# Altium PCB SH-C30L-V1.0.PcbDoc
Units mil, origin at the board's own origin, x right, y up, seen from the top; angles counter-clockwise.
Board outline 2690.16 x 1551.18 mil, 2 copper layers (Top Layer, Bottom Layer), stack 62.206 mil thick; 33 components, 25 nets, 131 pads, 46 vias.
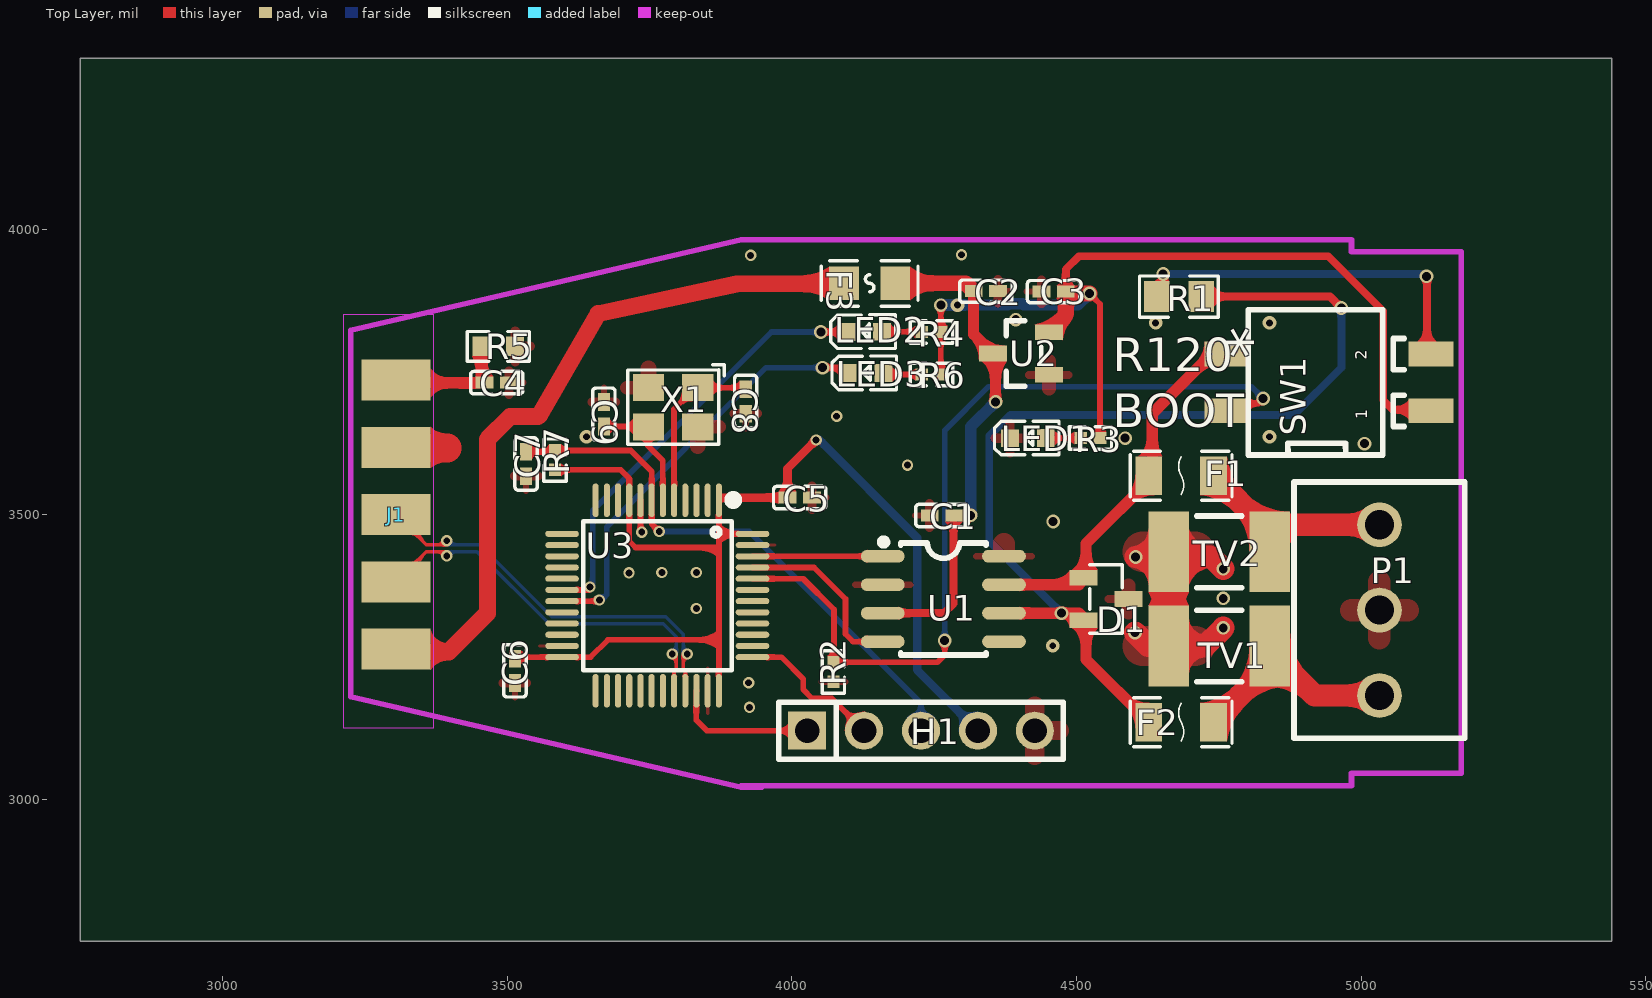
[diagram p0: Top Layer view]
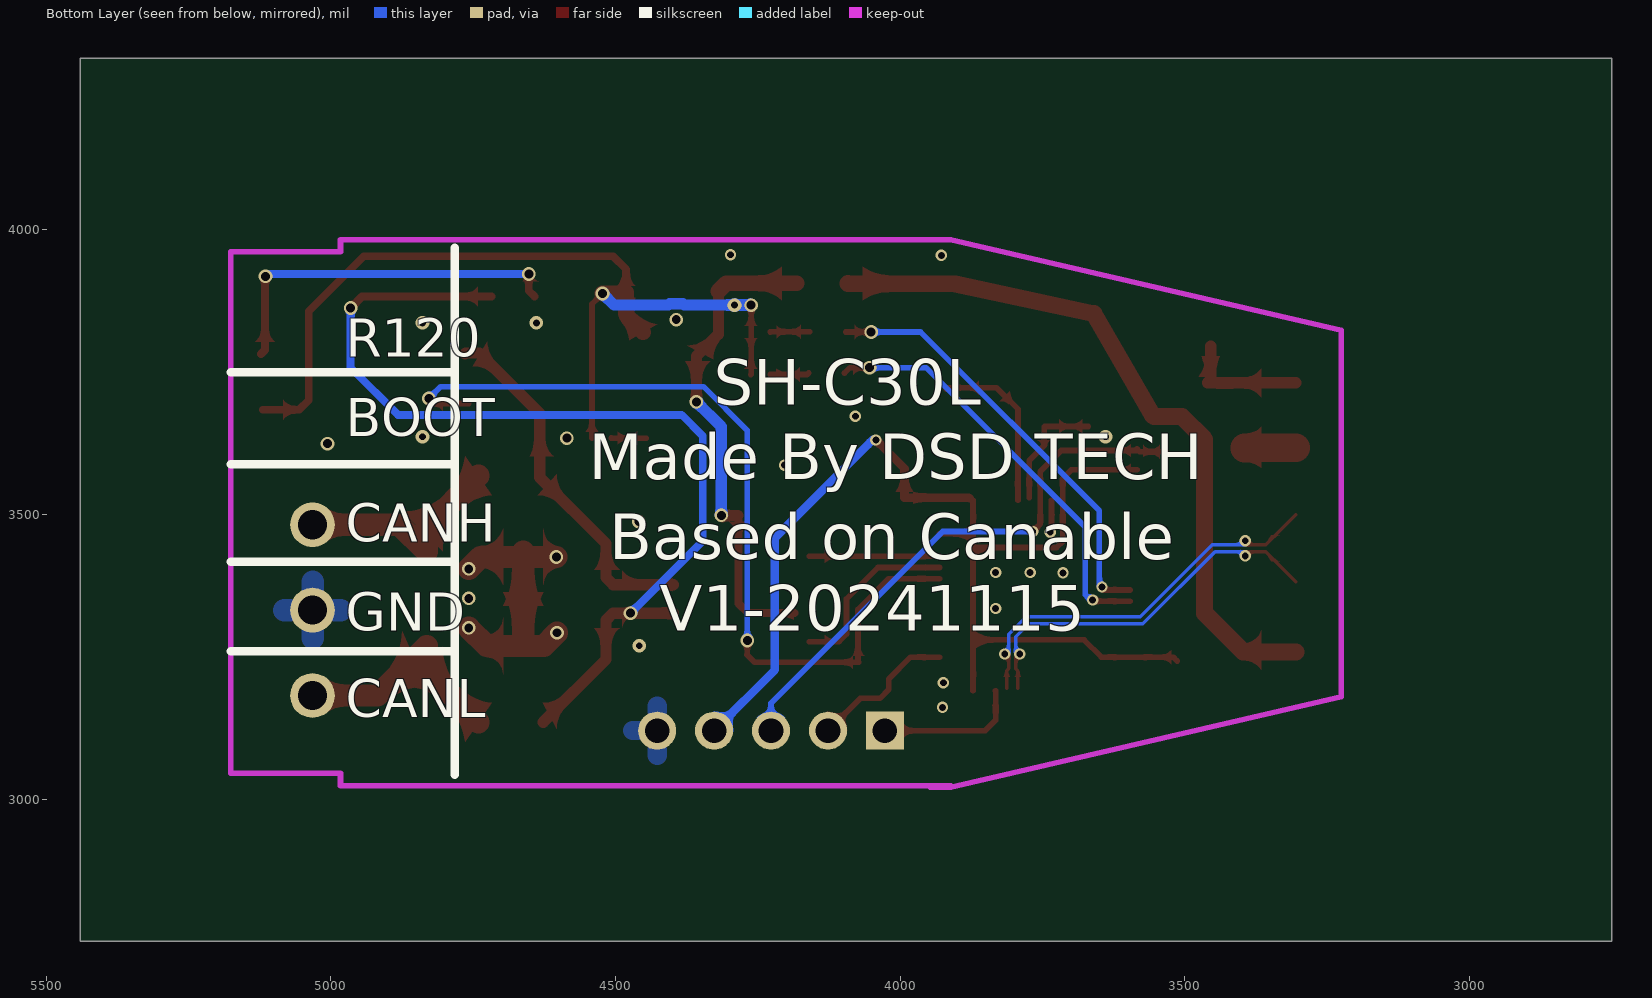
[diagram p1: Bottom Layer view, seen from below]

## Layer stack, top to bottom
Top Solder Mask Layer: solder mask 0.394, Dk 3.3
Top Layer: signal copper 1.379
Dielectric1: surface 59.449, FR4, Dk 4.5
Bottom Layer: signal copper 1.378
Bottom Solder Mask Layer: solder mask 0.394, Dk 3.3

## Board outline
5440.16,2750 2750,2750 2750,4301.18 5440.16,4301.18

## Design rules (kind name [scope] priority, off if disabled: settings)
BoardOutlineClearance Default [All] p0: genericclearance=10 ignorepadtopadclearanceinfootprint=FALSE except(0: Arc-SplitContinuation Track-SplitContinuation SMDPad-SplitContinuation THPad-SplitContinuation Via-SplitContinuation Fill-SplitContinuation Poly-SplitContinuation Region-SplitContinuation Text-SplitContinuation)
BoardOutlineClearance Plane_Default [All] p0: genericclearance=10 ignorepadtopadclearanceinfootprint=FALSE except(0: Arc-SplitContinuation Track-SplitContinuation SMDPad-SplitContinuation THPad-SplitContinuation Via-SplitContinuation Fill-SplitContinuation Poly-SplitContinuation Region-SplitContinuation Text-SplitContinuation)
BoardOutlineClearance Copper_gge7917 [All] p0: genericclearance=10 ignorepadtopadclearanceinfootprint=FALSE except(0: Arc-SplitContinuation Track-SplitContinuation SMDPad-SplitContinuation THPad-SplitContinuation Via-SplitContinuation Fill-SplitContinuation Poly-SplitContinuation Region-SplitContinuation Text-SplitContinuation)
BoardOutlineClearance Copper_gge7914 [All] p0: genericclearance=10 ignorepadtopadclearanceinfootprint=FALSE except(0: Arc-SplitContinuation Track-SplitContinuation SMDPad-SplitContinuation THPad-SplitContinuation Via-SplitContinuation Fill-SplitContinuation Poly-SplitContinuation Region-SplitContinuation Text-SplitContinuation)
BoardOutlineClearance otherClearance [All] p0: genericclearance=10 ignorepadtopadclearanceinfootprint=FALSE except(0: Arc-SplitContinuation Track-SplitContinuation SMDPad-SplitContinuation THPad-SplitContinuation Via-SplitContinuation Fill-SplitContinuation Poly-SplitContinuation Region-SplitContinuation Text-SplitContinuation)
Clearance Default [All] p1: gap=7 ignorepadtopadclearanceinfootprint=FALSE
Clearance Plane_Default [All] p1: gap=7 ignorepadtopadclearanceinfootprint=FALSE
Clearance Copper_gge7917 [All] p1: gap=7 ignorepadtopadclearanceinfootprint=FALSE
Clearance Copper_gge7914 [All] p1: gap=7 ignorepadtopadclearanceinfootprint=FALSE
Clearance otherClearance [All] p1: gap=7 ignorepadtopadclearanceinfootprint=FALSE
DiffPairsRouting differentialPair [All] p1: maxuncoupledlength=10 minlimit=6 maxlimit=Infinity mostfreqgap=6 toplayer_minwidth=5 toplayer_prefwidth=10 toplayer_maxwidth=100 bottomlayer_minwidth=5 bottomlayer_prefwidth=10 bottomlayer_maxwidth=100
PasteMaskExpansion pasteMaskExpansion [All] p1: expansion=0
PlaneConnect Default [All] p1: planeconnectstyle=Relief reliefexpansion=20 reliefentries=4 reliefconductorwidth=0 reliefairgap=10
PolygonConnect gge7917 [All] p1: connectstyle=Direct reliefentries=4 reliefconductorwidth=10 polygonreliefangle="90 Angle" airgapwidth=10
PolygonConnect gge7914 [All] p1: connectstyle=Relief reliefentries=4 reliefconductorwidth=0 polygonreliefangle="90 Angle" airgapwidth=10
RoutingVias Default [All] p1: viastyle="Through Hole" holewidth=12 minholewidth=12 maxholewidth=2362 width=12 minwidth=12 maxwidth=2362
SolderMaskExpansion solderMaskExpansion [IsVia] p1: useseparateexpansions=TRUE expansion=-1000 expansionbottom=-1000
SolderMaskExpansion solderMaskExpansion [All] p2: useseparateexpansions=TRUE expansion=4 expansionbottom=4
Width Default [All] p1: maxlimit=1000 minlimit=10 preferedwidth=10

## Components (designator, comment, footprint, x,y, rotation, side; value= is the part's Value field where it differs from the comment)
C1 "" C0402 4263.58,3498.03 r0 top locked
C2 "" C0402 4340.75,3892.12 r180 top locked
C3 "" C0402 4459.84,3891.33 r0 top locked
C4 "" C0402 3481.5,3731.49 r180 top locked
C5 "" C0402 4013.78,3529.52 r180 top locked
C6 "" C0402 3513.39,3225.19 r90 top locked
C7 "" C0402 3533.07,3588.58 r90 top locked
C8 "" C0402 3918.9,3698.42 r270 top locked
C9 "" C0402 3669.69,3675.98 r270 top locked
D1 "" SOT-23-3_L2.9-W1.3-P1.90-LS2.4-BR 4551.97,3351.49 r180 top locked
F1 "" F1206 4683.86,3568.03 r0 top locked
F2 "" F1206 4683.86,3134.96 r0 top locked
F3 "" F0805 4136.62,3905.9 r0 top locked
H1 "" HDR-TH_5P-P2.54-V-M 4226.77,3120.08 r0 top locked
J1 "" "4P-4AWD - PAD - DUPLICATE - DUPLICATE" 3304.88,3263.26 r0 top locked
LED1 "" LED0603-RD_RED 4414.57,3633.86 r0 top locked
LED2 "" LED0603-RD 4127.19,3820.73 r0 top locked
LED3 "" LED0603-RD 4129.14,3748.42 r0 top locked
P1 "" CONN-TH_3P-P3.81_WJ124-3.81-3P 5032.28,3331.81 r0 top locked
R1 "" R0805 4680.07,3882.67 r180 top locked
R2 "" R0402 4072.84,3223.23 r90 top locked
R3 "" R0402 4524.3,3634.25 r180 top locked
R4 "" R0402 4245.28,3820.47 r180 top locked
R5 "" R0603 3484.26,3795.27 r180 top locked
R6 "" R0402 4245.39,3745.67 r180 top locked
R7 "" R0402 3583.86,3595.27 r270 top locked
SW1 "" SW-SMD_4P-L6.5-W6.0-P2.54-LS9.8 4943.7,3731.89 r90 top locked
TV1 "" DIO-DT-SMD_L4.5-W3.2 4750.79,3268.82 r180 top locked
TV2 "" DIO-DT-SMD_L4.5-W3.2 4750.79,3434.17 r180 top locked
U1 "" SOIC-8_L5.0-W4.0-P1.27-LS6.0-BL 4266.14,3351.49 r270 top locked
U2 "ME6209A33M3G" SOT-23(SOT-23-3) 4402.36,3782.67 r90 top locked
U3 "" LQFP-48_L7.0-W7.0-P0.50-LS9.0-BL 3763.53,3357.5 r180 top locked
X1 "" OSC-SMD_4P-L3.2-W2.5-BL 3791.34,3688.19 r180 top locked

## Footprints (in the part's own frame and the unit in brackets; to place one, negate y for a bottom-side part, rotate by r counter-clockwise, add the part's x,y. Pads: shape width x height; smd on the part's side, far side on the other; paste and mask are expansions set on the pad)
"4P-4AWD - PAD - DUPLICATE - DUPLICATE" [mil]
  rect 121.17x72 smd: 1VBUS(0,0) 2D(0,118.11) 3D(0,236.22) 4GND(0,354.33) 5SHIELD(0,472.44)
C0402 [mm]
  rect 0.79x0.54 smd paste-100 mask+0.051: 1(-0.545,0) 2(0.545,0)
  silkscreen extent -1.17,-0.5 1.17,0.5
CONN-TH_3P-P3.81_WJ124-3.81-3P [mil]
  round 78.7 hole 51.2 paste+0 mask+2: 1(0,150) 2(0,0) 3(0,-150)
  silkscreen extent -150,-225 150,225
DIO-DT-SMD_L4.5-W3.2 [mil]
  rect 70.9x141.7 smd paste+0 mask+2: 1(-88.6,0) 2(88.6,0)
  silkscreen extent -39,-63 39,63
F0805 [mm]
  rect 1.335x1.5 smd paste-100 mask+0.051: 1(-1.142,0) 2(1.142,0)
  silkscreen extent -2.16,-1.02 2.16,1.02
F1206 [mil]
  rect 46.9x68 smd paste+0 mask+2: 1(-56.9,0) 2(56.9,0)
  silkscreen extent -89,-43 89,43
HDR-TH_5P-P2.54-V-M [mm]
  rect 1.7x1.7 hole 1.1 paste+0 mask+0.051: 1(-5.08,0)
  round 1.7 hole 1.1 paste+0 mask+0.051: 2(-2.54,0) 3(0,0) 4(2.54,0) 5(5.08,0)
  silkscreen extent -6.35,-1.27 6.35,1.27
LED0603-RD [mm]
  rect 0.8x0.8 smd paste+0 mask+0.051: 1(-0.799,-0.003) 2(0.799,0.003)
  silkscreen extent -1.49,-0.75 1.39,0.76
LED0603-RD_RED [mm]
  rect 0.8x0.8 smd paste+0 mask+0.051: 1(-0.8,-0.003) 2(0.8,0.003)
  silkscreen extent -1.49,-0.75 1.39,0.76
LQFP-48_L7.0-W7.0-P0.50-LS9.0-BL [mm]
  oval 0.27x1.5 smd paste+0 mask+0.05: 1(-2.75,-4.25) 2(-2.25,-4.25) 3(-1.75,-4.25) 4(-1.25,-4.25) 5(-0.75,-4.25) 6(-0.25,-4.25) 7(0.25,-4.25) 8(0.75,-4.25) 9(1.25,-4.25) 10(1.75,-4.25) 11(2.25,-4.25) 12(2.75,-4.25) 25(2.75,4.25) 26(2.25,4.25) 27(1.75,4.25) 28(1.25,4.25) 29(0.75,4.25) 30(0.25,4.25) 31(-0.25,4.25) 32(-0.75,4.25) 33(-1.25,4.25) 34(-1.75,4.25) 35(-2.25,4.25) 36(-2.75,4.25)
  oval 1.5x0.27 smd paste+0 mask+0.05: 13(4.25,-2.75) 14(4.25,-2.25) 15(4.25,-1.75) 16(4.25,-1.25) 17(4.25,-0.75) 18(4.25,-0.25) 19(4.25,0.25) 20(4.25,0.75) 21(4.25,1.25) 22(4.25,1.75) 23(4.25,2.25) 24(4.25,2.75) 37(-4.25,2.75) 38(-4.25,2.25) 39(-4.25,1.75) 40(-4.25,1.25) 41(-4.25,0.75) 42(-4.25,0.25) 43(-4.25,-0.25) 44(-4.25,-0.75) 45(-4.25,-1.25) 46(-4.25,-1.75) 47(-4.25,-2.25) 48(-4.25,-2.75)
  silkscreen extent -3.59,-4.46 3.3,3.34
OSC-SMD_4P-L3.2-W2.5-BL [mm]
  rect 1.4x1.2 smd paste+0 mask+0.051: 1(-1.1,-0.875) 2(1.1,-0.875) 3(1.1,0.875) 4(-1.1,0.875)
  silkscreen extent -2.29,-1.9 2.03,1.65
R0402 [mm]
  rect 0.566x0.54 smd paste-100 mask+0.051: 1(-0.433,0) 2(0.433,0)
  silkscreen extent -0.94,-0.5 0.94,0.5
R0603 [mil]
  rect 31.75x34.02 smd paste-3937.01 mask+2: 1(-29.66,0) 2(29.66,0)
  silkscreen extent -55,-26 55,26
R0805 [mm]
  rect 1.133x1.377 smd paste-100 mask+0.051: 1(-1,0) 2(1,0)
  silkscreen extent -1.76,-0.92 1.76,0.92
SOIC-8_L5.0-W4.0-P1.27-LS6.0-BL [mil]
  oval 22.38x76.78 smd paste+0 mask+2: 1(-75,-106.5) 2(-25,-106.5) 3(25,-106.5) 4(75,-106.5) 5(75,106.5) 6(25,106.5) 7(-25,106.5) 8(-75,106.5)
  silkscreen extent -106,-111 98,75
SOT-23(SOT-23-3) [mm]
  rect 0.7x1.25 smd paste+0 mask+0.102: 1(-0.95,-1.25) 2(0.95,-1.25) 3(0,1.25)
  silkscreen extent -1.46,-0.9 1.46,0.65
SOT-23-3_L2.9-W1.3-P1.90-LS2.4-BR [mm]
  rect 1.25x0.7 smd paste+0 mask+0.051: 1(1,-0.95) 2(1,0.95) 3(-1,0)
  silkscreen extent -0.73,-1.53 0.73,1.53
SW-SMD_4P-L6.5-W6.0-P2.54-LS9.8 [mm]
  rect 1.1x2 smd paste+0 mask+0.051: 1(-1.27,-4.55) 2(1.27,-4.55) 3(1.27,4.55) 4(-1.27,4.55)
  silkscreen extent -3.24,-3.35 3.24,3.6

## Via types
v1: diameter 24.02, hole 15.7, Top Layer to Bottom Layer, 21 vias
v2: diameter 20, hole 12, Top Layer to Bottom Layer, 19 vias
v3: diameter 24, hole 12, Top Layer to Bottom Layer, 6 vias

## Nets (pads, with @x,y where several pads share a name; then routed paths per layer and width w, separated by ;. In a path a pad name is that pad's centre, name@x,y a point inside that pad or via, vN(x,y) a via of type N, cw(c..) or ccw(c..) an arc to the next point about the centre after c; other vN are vias at no path point)
$3N9456: F1.2 P1.1 TV2.1 | length 392
  Top Layer w39.37: F1.2 4831.51,3477.27 4831.51,3434.17 4879.15,3481.81 P1.1
$3N14841: F3.1 J1.1VBUS | length 1242.4
  Top Layer w30: J1.1VBUS@3304.88,3258.54 3397.13,3258.54 3464.96,3326.38 3464.96,3631.89 3504.73,3671.65 3553.55,3671.65 ; 3556.7,3674.01 3659.85,3852.75 3902.36,3904.72 F3.1
$3N14842: LED1.2 R3.2 | length 61.3
  Top Layer w10: LED1.2 4507,3633.99 R3.2
$3N14843: LED2.2 R4.2 | length 69.7
  Top Layer w10: LED2.2 4227.84,3820.86 R4.2
$3N14844: LED3.2 R6.2 | length 68.9
  Top Layer w10: LED3.2 4163.5,3745.67 R6.2
$3N22964: C9.2 U3.6 X1.3 | length 213.1
  Top Layer w10: C9.2 3746.07,3654.52 3746.85,3653.74 3746.85,3620.87 3773.37,3594.35 U3.6@3773.37,3529.15
$3N23449: C8.1 U3.5 X1.1 | length 302.7
  Top Layer w10: U3.5 3793.06,3684.98 3830.71,3722.64 X1.1 3916.15,3722.64 C8.1
$3N28180: F2.2 P1.3 TV1.1 | length 408.3
  Top Layer w39.37: F2.2 4831.51,3225.71 4831.51,3268.82 4918.52,3181.81 P1.3
$3N29005: R1.2 SW1.2 | length 656.1
  Top Layer w13.78: R1.2@4642.03,3882.67 4652.36,3893.01 v1(4652.36,3922.44) ; SW1.2 5115.75,3788.97 v1@5115.75,3918.11 ; v1@5115.75,3918.11 5114.96,3918.89 5115.75,3919.68 v1@5115.75,3918.11
  Bottom Layer w13.78: v1(4652.36,3922.44) v1@5110.63,3922.44 ; v1(5114.96,3918.11) v1@5110.63,3922.44 ; v1@5115.35,3922.44 v1@5110.63,3922.44
$3N35720: C4.2 J1.5SHIELD R5.2 | length 221.4
  Top Layer w20: J1.5SHIELD@3304.88,3730.98 3459.53,3730.98 C4.2 3454.6,3736.94 R5.2
+3V3: C3.2 C5.2 C6.2 H1.4 R3.1 R4.1 R6.1 R7.2 SW1.1 U2.2 U3.1 U3.9 U3.24 U3.36 U3.48 | length 3714
  Top Layer w10: C6.2@3513.39,3242.32 3520.29,3249.23 U3.24 3646.48,3249.23 3676.77,3279.53 3871.71,3279.53 3871.8,3279.61 ; R7.2 3699.33,3578.23 3714.32,3563.24 U3.9@3714.32,3529.15 ; U3.9 3714.32,3452.61 3725.2,3441.73 3867.2,3441.73 3871.8,3446.33 ; U3.36 3871.8,3279.61 ; U3.1 3871.8,3446.33 ; 3872.44,3466.14 3872.82,3465.77 U3.48 ; v1(4261.77,3867.71) 4261.77,3746.32 R6.1 ; v1(4522.84,3888.19) 4541.34,3869.68 R3.1 ; 3871.8,3279.61 3871.8,3446.33
  Top Layer w13.78: C3.2@4481.3,3890.15 4481.3,3930.51 4504.33,3953.54 4942.13,3953.54 5038.98,3856.69 5038.98,3700.78 5055.91,3683.86 SW1.1@5119.69,3683.86
  Top Layer w15: 3877.96,3528.34 3879.14,3529.52 C5.2 3992.32,3580.51 v2(4042.52,3630.71)
  Top Layer w27.56: U2.2 4481.3,3849.81 4481.3,3890.15 4483.27,3888.19 v1(4522.84,3888.19)
  Bottom Layer w15: v2(4042.52,3630.71) 4048.43,3630.71 4220.08,3459.05 4220.08,3226.77 H1.4
  Bottom Layer w19.68: v1(4261.77,3867.71) v3(4290.86,3867.71) 4379.51,3867.71 4381.77,3869.97 4404.84,3869.97 4407.1,3867.71 4502.36,3867.71 v1(4522.84,3888.19)
+5V: C1.2 C2.2 F3.2 U1.3 U2.3 | length 861.9
  Top Layer w13.78: U1.3@4185.63,3326.49 4267.05,3326.49 4283.86,3343.3 4283.86,3494.49 4286.22,3496.85 C1.2
  Top Layer w19.68: C1.2 4313.78,3498.03 v1(4314.18,3498.42) ; C2.2 4319.29,3816.55 U2.3 4357.88,3777.96 v1(4357.88,3697.63)
  Top Layer w27.6: F3.2 4305.51,3905.9 C2.2
  Bottom Layer w19.68: v1(4314.18,3498.42) 4314.18,3653.93 v1(4357.88,3697.63)
BOOT0: R2.2 SW1.4 U3.44 | length 1532.5
  Top Layer w10: U3.44 4020.06,3387.03 4074.02,3333.07 4074.02,3241.45 R2.2 4255.62,3240.27 4268.9,3253.54 ; v1@4263.78,3280.71 v1@4268.31,3285.23 ; 4268.51,3255.51 v1(4268.51,3278.34) ; SW1.4@4757.88,3694.88 4819.29,3694.88 v1(4827.95,3703.54)
  Bottom Layer w10: v1(4268.51,3278.34) 4268.51,3647.63 4345.28,3724.41 4807.09,3724.41 v1(4827.95,3703.54)
CAN_RXD: U1.4 U3.45 | length 318.9
  Top Layer w10: U3.45 4038.96,3406.71 4094.1,3351.57 4094.1,3289.76 4107.36,3276.49 U1.4
CAN_TXD: U1.1 U3.46 | length 228.8
  Top Layer w10: U3.46 4111.16,3426.4 4111.25,3426.49 U1.1
GND: C1.1 C2.1 C3.1 C4.1 C5.1 C6.1 C7.1 C8.2 C9.1 D1.3 H1.5 J1.4GND LED1.1 P1.2 R2.1 R5.1 TV1.2 TV2.2 U1.2 U1.8 U2.1 U3.8 U3.23 U3.35 U3.47 X1.2 X1.4 | length 646.4
  Top Layer w10: U3.8 3734,3475.05 v2@3734.25,3474.8
  Top Layer w39.37: v1(4602.76,3292.12) 4626.06,3268.82 TV1.2 ; v1(4603.94,3425.19) TV2.2@4662.19,3425.19 ; TV2.2 TV2.2@4662.19,3425.19 ; v1(4757.87,3300.78) 4725.91,3268.82 TV1.2 ; v1(4757.87,3404.33) 4737.01,3425.19 TV2.2@4662.19,3425.19 ; TV1.2 TV2.2@4662.19,3425.19
  Top Layer w50: J1.4GND@3304.88,3616.81 3394.22,3616.81 3394.89,3616.14
  other v1: 4757.87,3352.56 4459.06,3487.4 5005.91,3624.41 4585.43,3633.86 4393.31,3842.12
  other v2: 3925.59,3161.02 3924.02,3204.33 3832.29,3334.64 3713.78,3397.24 3771.66,3398.03 3832.29,3398.03 3736.22,3468.89 4203.15,3586.61 4078.64,3672.44 3927.56,3955.11 4298.03,3956.3
  other v3: 4458.35,3269.19 3639.06,3636.51 4839.06,3636.51 4639.06,3836.51 4839.06,3836.51
JL-SWCLK: H1.2 U3.37 | length 260.3
  Top Layer w10: U3.37 3981.48,3249.23 4019.87,3210.84 4019.87,3192.34 4035.44,3176.77 4070.08,3176.77 H1.2
JL-SWDIO: H1.1 U3.34 | length 254.4
  Top Layer w10: U3.34 3831.89,3189.64 3831.89,3138.58 3850.4,3120.08 H1.1
LED1: LED2.1 U3.18 | length 760
  Top Layer w10: U3.18 3644.51,3367.34 v2@3647.25,3370.08 ; v1(4050.79,3820.47) 4095.59,3820.47 LED2.1
  Bottom Layer w10: v2@3650,3374.41 3650,3506.3 3964.18,3820.47 v1(4050.79,3820.47)
  other v2: 3645.28,3372.44
LED2: LED3.1 U3.19 | length 736.4
  Top Layer w10: U3.19 3655.93,3347.66 v2@3656.3,3348.03 ; v1(4053.94,3757.87) 4088.08,3757.87 LED3.1
  Bottom Layer w10: v2@3664.57,3348.82 3674.81,3359.05 3674.81,3477.95 3954.73,3757.87 v1(4053.94,3757.87)
  other v2: 3661.81,3349.6
NRST: C7.2 H1.3 R7.1 U3.7 | length 972.4
  Top Layer w10: C7.2 R7.1@3578.83,3610.04 ; R7.1@3582.48,3613.69 R7.1@3583.86,3615.07 ; R7.1 3716.82,3612.31 3753.69,3575.44 U3.7@3753.69,3529.15 ; U3.7 3753.69,3483.14 v2(3766.93,3469.9)
  Bottom Layer w10: v2(3766.93,3469.9) 3924.98,3469.9 4226.77,3168.11 H1.3
UCAN_H: D1.1 F1.1 SW1.3 U1.7 | length 636
  Top Layer w19.68: U1.7@4398.63,3376.49 4504.53,3376.49 4516.93,3388.89 4516.93,3448.82 4633.07,3564.96 4633.07,3677.16 4739.37,3783.46 4763,3783.46 SW1.3
UCAN_L: D1.2 F2.1 R1.1 U1.6 | length 1740.5
  Top Layer w13.78: R1.1@4718.11,3882.67 4945.28,3882.67 v1(4965.35,3862.59)
  Top Layer w19.68: U1.6@4398.63,3326.49 v1(4473.73,3326.49) 4504.53,3326.49 4516.93,3314.09 4516.93,3244.99 F2.1
  Bottom Layer w13.78: v1(4473.73,3326.49) 4346.85,3453.38 4346.85,3637.79 4383.86,3674.8 4882.28,3674.8 4965.35,3757.87 v1(4965.35,3862.59)
USBDM: J1.2D U3.32 | length 662.6
  Top Layer w6: J1.2D 3357.93,3434.43 v2@3393.7,3434.43 ; U3.32@3793.06,3194.51 3793.06,3224.94 3796.9,3228.78 v2@3796.9,3252.75
  Bottom Layer w6: v2@3395.28,3434.64 3446.85,3434.64 3573.42,3308.08 3773.77,3308.08 3797.03,3284.82 v2@3797.03,3256.69
  other v2: 3789.77,3254.72 3393.7,3427.1
USBDP: J1.3D U3.33 | length 682.5
  Top Layer w6: J1.3D 3357.93,3446.43 v2@3393.7,3446.43 ; v2@3808.9,3252.75 3808.9,3229.29 3812.74,3225.45 U3.33@3812.74,3194.51
  Bottom Layer w6: v2@3395.28,3446.64 3451.82,3446.64 3578.39,3320.08 3778.74,3320.08 3809.03,3289.79 v2@3809.03,3256.69
  other v2: 3816.14,3254.72 3393.7,3453.72
pads on no net: U1.5 U3.2 U3.3 U3.4 U3.10 U3.11 U3.12 U3.13 U3.14 U3.15 U3.16 U3.17 U3.20 U3.21 U3.22 U3.25 U3.26 U3.27 U3.28 U3.29 U3.30 U3.31 U3.38 U3.39 U3.40 U3.41 U3.42 U3.43

## Polygon pours and split planes (outlines as drawn)
$3N14841 on Top Layer (solid, remove dead copper, pour order 0): 4122.05,3935.82 4029.92,3935.82 4027.17,3933.07 4027.17,3878.34 4030.71,3874.8 4122.42,3874.8 4124.18,3876.63 4124.18,3933.69
GND on Top Layer (solid, remove dead copper, pour order 2): 3000,3990.94 3000,3003.94 5175.59,3003.94 5175.59,3990.94
GND on Bottom Layer (solid, remove dead copper, pour order 8): 3038.98,4015.75 3038.98,3000 5190.16,3000 5190.16,4015.75
+3V3 on Bottom Layer (solid, remove dead copper, pour order 4): 4301.97,3881.1 4251.58,3881.1 4251.18,3881.49 4249.21,3881.49 4245.67,3877.95 4245.67,3784.25 4108.66,3647.24 4034.65,3647.24 4031.1,3643.7 4031.1,3621.15 4035.72,3616.53 4121.26,3616.53 4274.41,3769.68 4274.41,3845.27 4274.81,3845.67 4274.81,3848.42 4279.14,3852.75 4302.36,3852.75 4304.33,3854.72 4304.73,3854.72 4304.73,3878.34
+3V3 on Bottom Layer (solid, remove dead copper, pour order 6): 4305.91,3876.77 4301.58,3881.1 4301.58,3881.49 4251.97,3881.49 4248.82,3878.34 4248.82,3858.66 4251.97,3855.51 4301.97,3855.51 4305.91,3859.45

## Keep-outs
Top Layer:
  region: 3211.82,3850.78 3211.82,3124.8 3370.87,3124.8 3370.87,3850.78
Board Outline Layer:
  lines w10: 3224.96,3411.21 3224.96,3776.27 3224.98,3776.27 3224.98,3823.27 3910.98,3982.27 4982.98,3982.27 4982.98,3961.27 5175.98,3961.27 5175.98,3045.27 4982.98,3045.27 4982.98,3023.27 3910.98,3023.27 ; 3224.98,3597.96 3224.98,3179.91 3910.98,3020.91 3946.98,3020.91

## Other copper
Top Layer:
  drawing of 123 lines, arcs and shapes, not listed
Bottom Layer:
  region net NRST: 4221.77,3165.81 4231.77,3165.81 4231.89,3163.21 4232.22,3160.97 4232.76,3159.05 4233.49,3157.41 4234.39,3156 4235.45,3154.77 4236.66,3153.67 4238.01,3152.67 4241.02,3150.75 4244.39,3148.65 4248,3145.98 4249.85,3144.32 4251.72,3142.39 4201.83,3142.39 4203.7,3144.32 4205.55,3145.98 4209.15,3148.65 4212.52,3150.75 4215.54,3152.67 4216.88,3153.67 4218.09,3154.77 4219.16,3156 4220.06,3157.41 4220.79,3159.05 4221.33,3160.97 4221.66,3163.21
  region net +3V3: 4289.13,3147.11 4299.74,3157.72 4301.44,3156.16 4303.1,3154.91 4304.72,3153.96 4306.32,3153.26 4307.91,3152.79 4309.5,3152.51 4312.76,3152.41 4316.19,3152.71 4319.91,3153.16 4324.02,3153.5 4328.64,3153.49 4293.36,3118.21 4293.35,3122.83 4293.69,3126.94 4294.14,3130.66 4294.44,3134.09 4294.34,3137.35 4294.06,3138.94 4293.59,3140.53 4292.89,3142.13 4291.94,3143.75 4290.69,3145.41
  region net BOOT0: 4263.51,3294.75 4273.51,3294.75 4273.59,3293.63 4273.85,3292.5 4274.74,3290.27 4276.01,3288.18 4277.46,3286.35 4259.56,3286.35 4261.01,3288.18 4262.27,3290.27 4263.17,3292.5 4263.42,3293.63
  region net +3V3: 4519.61,3871.04 4505.69,3884.96 4507.49,3886.89 4509.09,3888.84 4511.66,3892.46 4513.41,3895.26 4514.35,3896.68 4531.33,3879.69 4529.91,3878.76 4527.11,3877.01 4523.49,3874.44 4521.54,3872.84
  region net LED1: 4034.38,3815.47 4034.38,3825.47 4035.5,3825.56 4036.63,3825.81 4038.86,3826.7 4040.96,3827.97 4042.78,3829.42 4042.78,3811.52 4040.96,3812.97 4038.86,3814.23 4036.63,3815.13 4035.5,3815.38
  region net LED2: 4037.53,3752.87 4037.53,3762.87 4038.65,3762.96 4039.78,3763.21 4042.01,3764.11 4044.11,3765.37 4045.93,3766.82 4045.93,3748.92 4044.11,3750.37 4042.01,3751.64 4039.78,3752.53 4038.65,3752.78
  region net +3V3: 4276.18,3877.56 4276.18,3857.87 4273.54,3857.78 4271.03,3857.53 4266.65,3856.79 4263.43,3856.04 4261.77,3855.7 4261.77,3879.72 4263.43,3879.38 4266.65,3878.64 4271.03,3877.89 4273.54,3877.65
  region net +5V: 4304.33,3512.83 4324.02,3512.83 4324.11,3510.19 4324.36,3507.68 4325.1,3503.3 4325.84,3500.08 4326.18,3498.42 4302.17,3498.42 4302.51,3500.08 4303.25,3503.3 4303.99,3507.68 4304.24,3510.19
  region net +5V: 4354.65,3680.49 4340.73,3694.41 4342.53,3696.34 4344.13,3698.29 4346.7,3701.91 4348.45,3704.71 4349.38,3706.13 4366.37,3689.14 4364.95,3688.21 4362.15,3686.46 4358.53,3683.89 4356.58,3682.29
  region net BOOT0: 4812.81,3711.61 4819.88,3718.68 4820.74,3717.95 4821.72,3717.33 4823.93,3716.38 4826.3,3715.8 4828.62,3715.53 4815.96,3702.87 4815.7,3705.19 4815.11,3707.56 4814.17,3709.78 4813.54,3710.75
  region net UCAN_L: 4457.26,3333.23 4467,3342.97 4468.64,3341.38 4470.37,3339.98 4472.26,3338.95 4473.3,3338.64 4474.4,3338.48 4461.74,3325.83 4461.59,3326.93 4461.27,3327.96 4460.25,3329.86 4458.84,3331.59
  region net UCAN_L: 4972.24,3846.18 4958.47,3846.18 4958.43,3848.46 4958.2,3850.68 4957.58,3852.75 4957.08,3853.7 4956.4,3854.59 4974.31,3854.59 4973.63,3853.7 4973.12,3852.75 4972.51,3850.68 4972.28,3848.46
  region net +3V3: 4058.68,3631.06 4051.79,3616.74 4050.72,3618.14 4049.44,3619.96 4048.11,3621.41 4047.46,3621.74 4046.84,3621.69 4051.54,3635.02 4052.19,3634.04 4052.95,3633.41 4053.81,3633.02 4054.74,3632.78 4056.72,3632.29 4057.72,3631.82
  region net +3V3: 4276.46,3857.87 4276.46,3877.56 4279.11,3877.65 4281.61,3877.89 4285.99,3878.63 4289.2,3879.38 4290.86,3879.71 4290.86,3855.71 4289.2,3856.05 4285.99,3856.79 4281.61,3857.53 4279.11,3857.78
  region net +3V3: 4305.26,3877.56 4305.26,3857.87 4302.62,3857.78 4300.11,3857.53 4295.74,3856.79 4292.52,3856.05 4290.86,3855.71 4290.86,3879.71 4292.52,3879.38 4295.74,3878.63 4300.11,3877.89 4302.62,3877.65
  region net NRST: 3780.6,3474.9 3780.6,3464.9 3778.83,3464.72 3776.9,3464.21 3775.06,3463.43 3773.6,3462.45 3773.6,3477.36 3775.06,3476.37 3776.9,3475.6 3778.83,3475.09
  region net USBDM: 3794.03,3271.72 3800.03,3263.69 3799.99,3258.75 3799.73,3253.82 3789.5,3264.72 3790.68,3264.9 3791.66,3265.37 3792.45,3266.07 3793.06,3266.96 3793.5,3268.02 3793.81,3269.19
  region net USBDP: 3806.03,3263.69 3812.03,3271.71 3812.26,3269.2 3812.57,3268.04 3813.03,3266.99 3813.64,3266.09 3814.43,3265.39 3815.4,3264.92 3816.57,3264.71 3806.17,3254.03 3806,3258.86
  region net LED1: 3645,3388.84 3655,3381.79 3654.85,3378.27 3654.82,3376.36 3655,3374.79 3641.86,3381.84 3642.78,3382.3 3643.51,3382.94 3644.06,3383.72 3644.46,3384.61 3644.9,3386.65
  region net LED2: 3670.88,3362.2 3675.31,3352.49 3674.14,3351.21 3673,3349.73 3672.02,3348.14 3671.34,3346.56 3663.78,3359.41 3664.71,3359.32 3665.67,3359.39 3667.59,3359.96 3669.38,3360.96
  region net USBDM: 3402.28,3437.64 3410.7,3431.64 3408.13,3431.43 3406.94,3431.15 3405.88,3430.71 3404.99,3430.11 3404.3,3429.33 3403.86,3428.35 3403.7,3427.15 3392.38,3437.01 3397.32,3437.45
  region net USBDP: 3410.69,3449.64 3402.28,3443.64 3397.68,3443.6 3393.08,3443.73 3403.69,3454.19 3403.9,3453.02 3404.38,3452.05 3405.08,3451.26 3405.98,3450.64 3407.03,3450.19 3408.19,3449.88

## Silkscreen, mask and mechanical layers (free items; w line width, h text height)
Top Silkscreen Layer:
  text "R120" at 4563.78,3751.57 h59.06
  text "BOOT" at 4563.78,3653.15 h59.06
Bottom Silkscreen Layer:
  lines w15: 4782.28,3042.91 4782.28,3968.11 ; 4782.28,3259.45 5175.98,3259.45 ; 4782.28,3416.93 5175.98,3416.93 ; 4782.28,3587.91 5175.98,3587.91 ; 4782.28,3749.84 5175.98,3749.84
  text "R120" at 4974.28,3777.16 h66.93
  text "SH-C30L" at 4327.56,3692.52 h79.92
  text "BOOT" at 4974.28,3637 h66.93
  text "Made By DSD TECH" at 4547.25,3561.41 h79.92
  text "CANH" at 4974.28,3451.97 h66.93
  text "Based on Canable" at 4511.02,3420.86 h79.92
  text "GND" at 4974.28,3295.67 h66.93
  text "V1-20241115" at 4422.05,3295.27 h79.92
  text "CANL" at 4974.28,3143.3 h66.93

## Dimensions
3222.44,4051.18 to 3516.54,4051.18 on Document Layer

## Text inside footprints (layer, text, board x,y; h text height)
SW1: Top Silkscreen Layer "1" at 5010.61,3666.79 h19.68 r90; Top Silkscreen Layer "*" at 4843.38,3774.43 h80 r90; Top Silkscreen Layer "2" at 5010.31,3771.3 h19.68 r90